# Altium PCB PCB1.PcbDoc
Units mm, origin at the board's own origin, x right, y up, seen from the top; angles counter-clockwise.
Board outline 47 x 47 mm, 2 copper layers (Top Layer, Bottom Layer); 38 components, 26 nets, 134 pads, 140 vias.
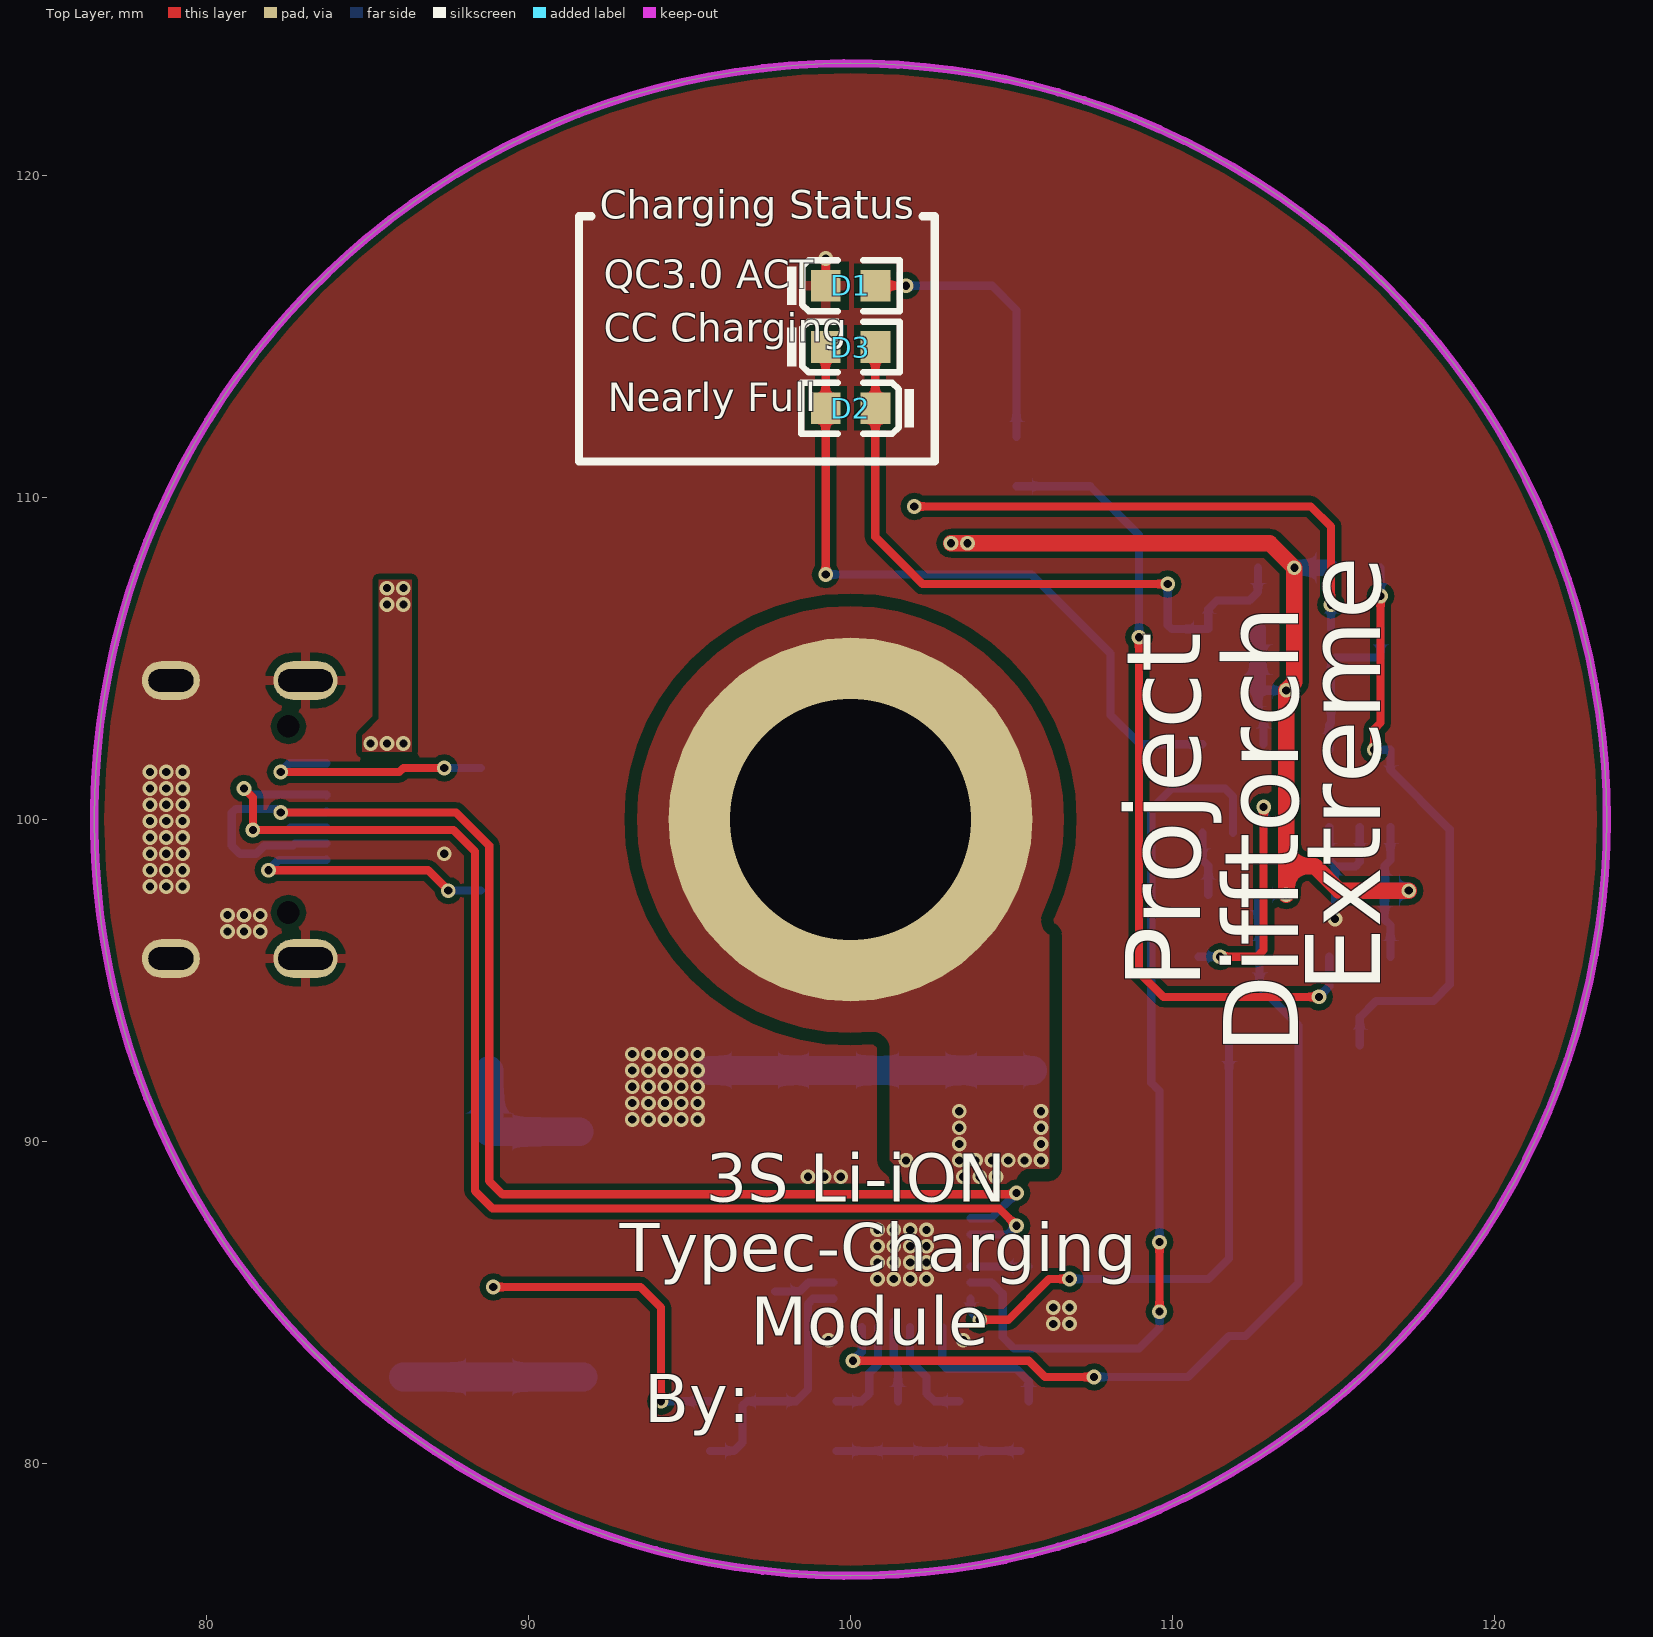
[diagram p0: Top Layer view]
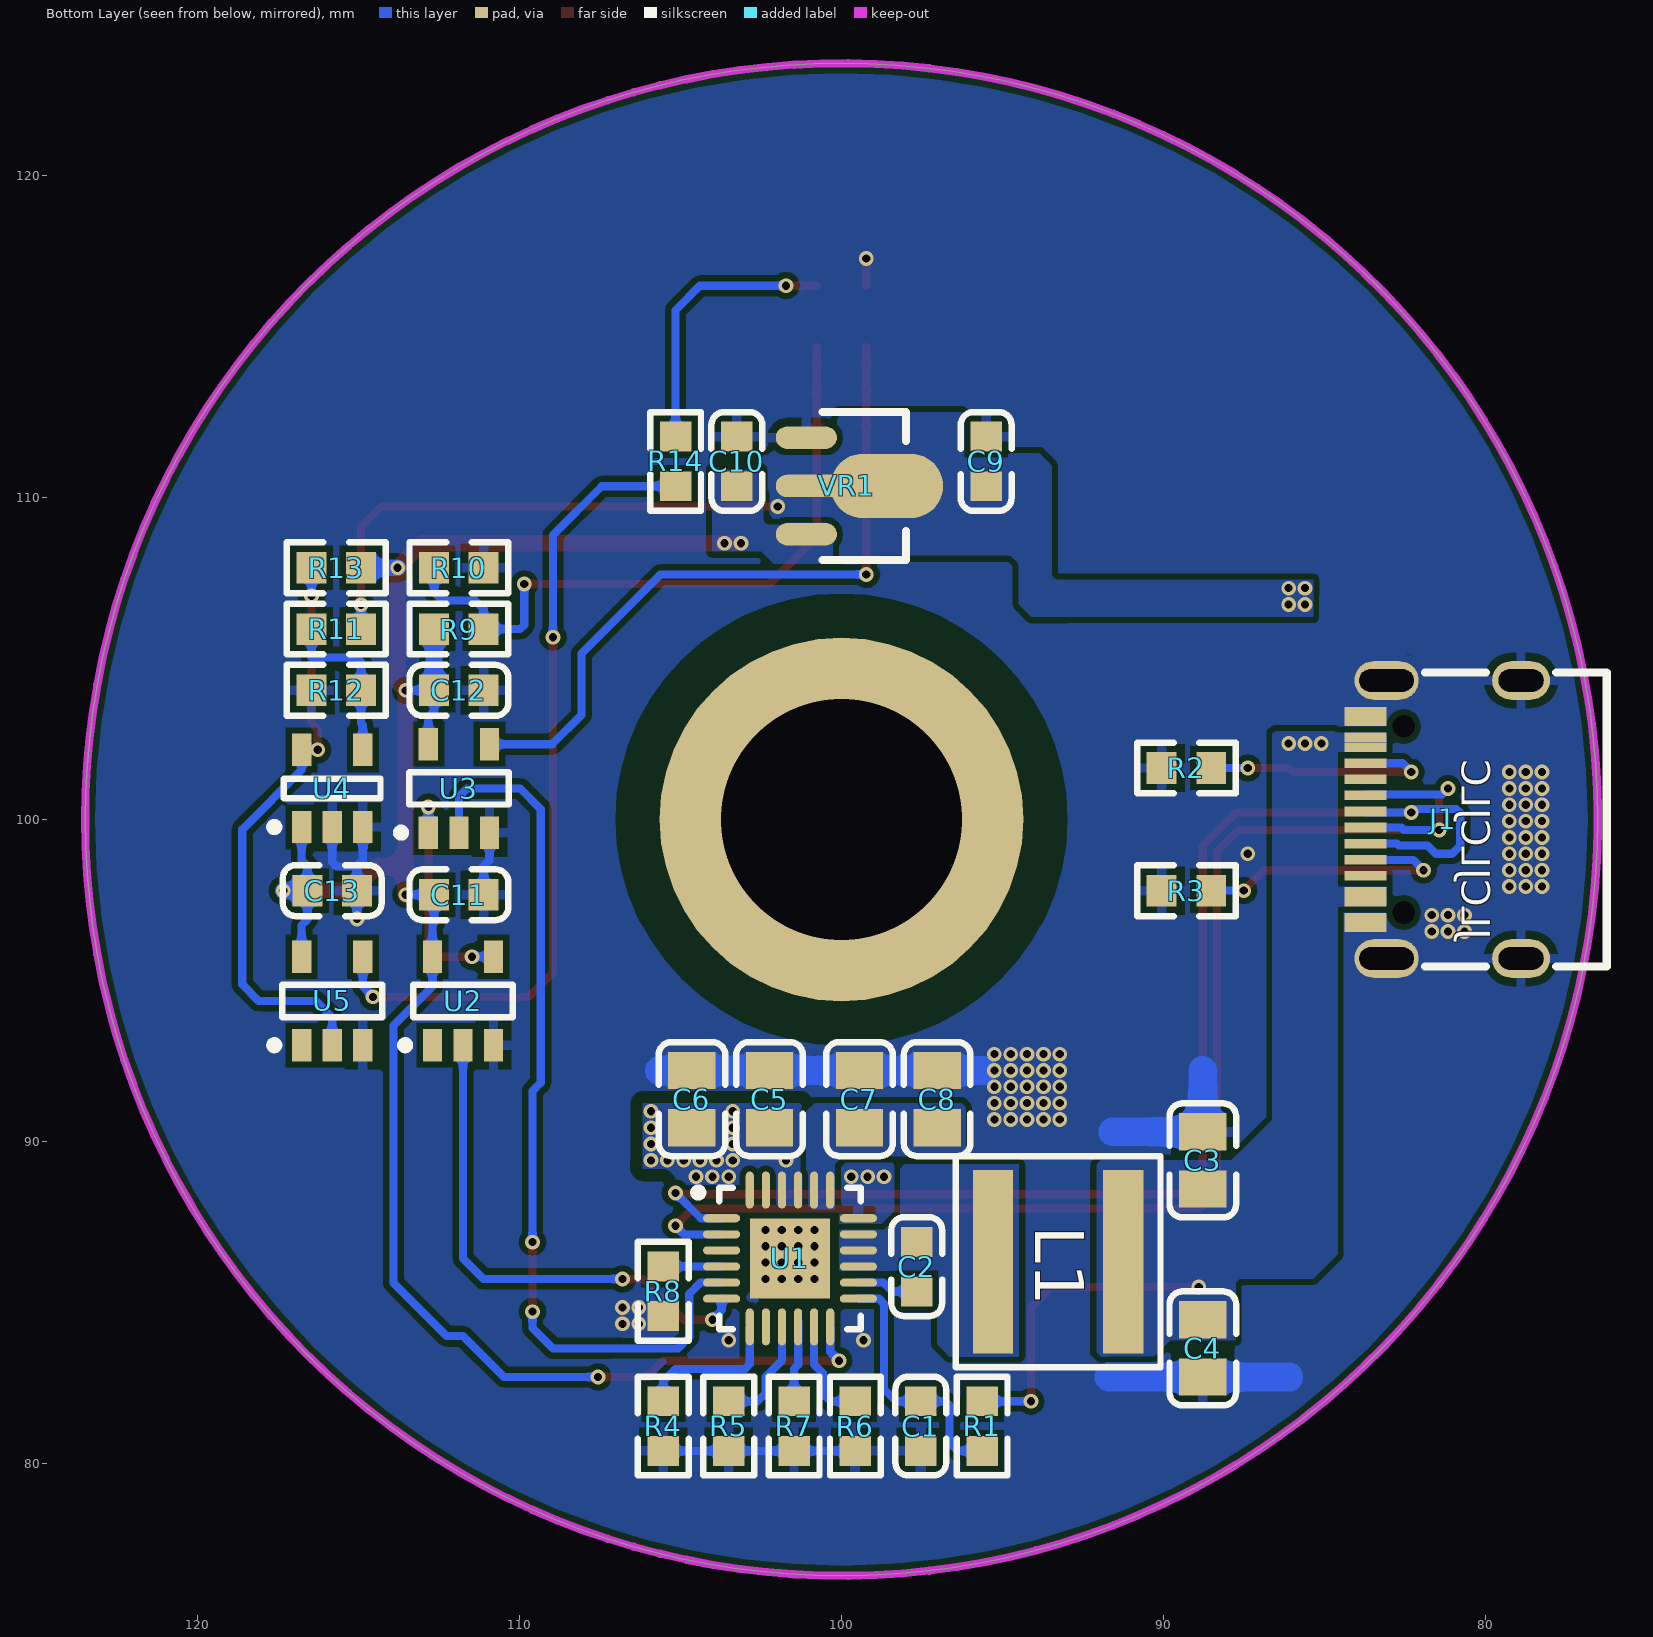
[diagram p1: Bottom Layer view, seen from below]
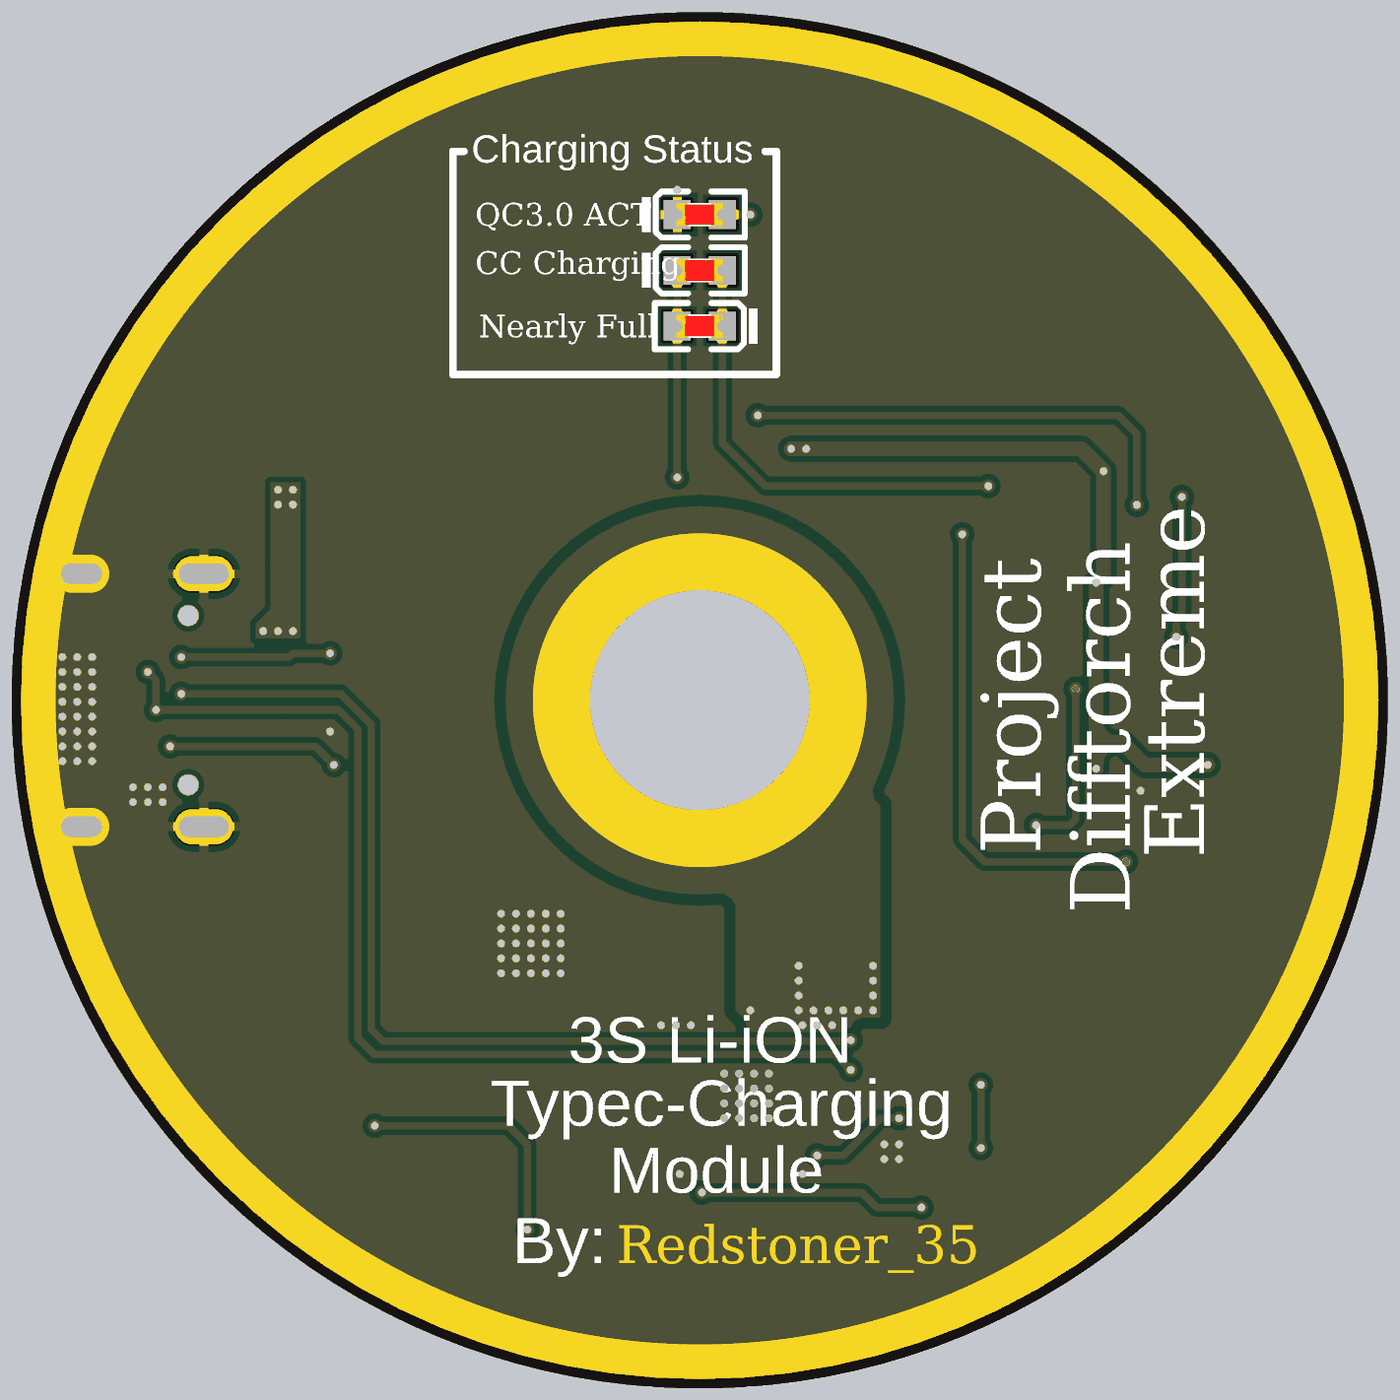
[diagram p2: 3D render of the assembled board from above, using the file's embedded part models]
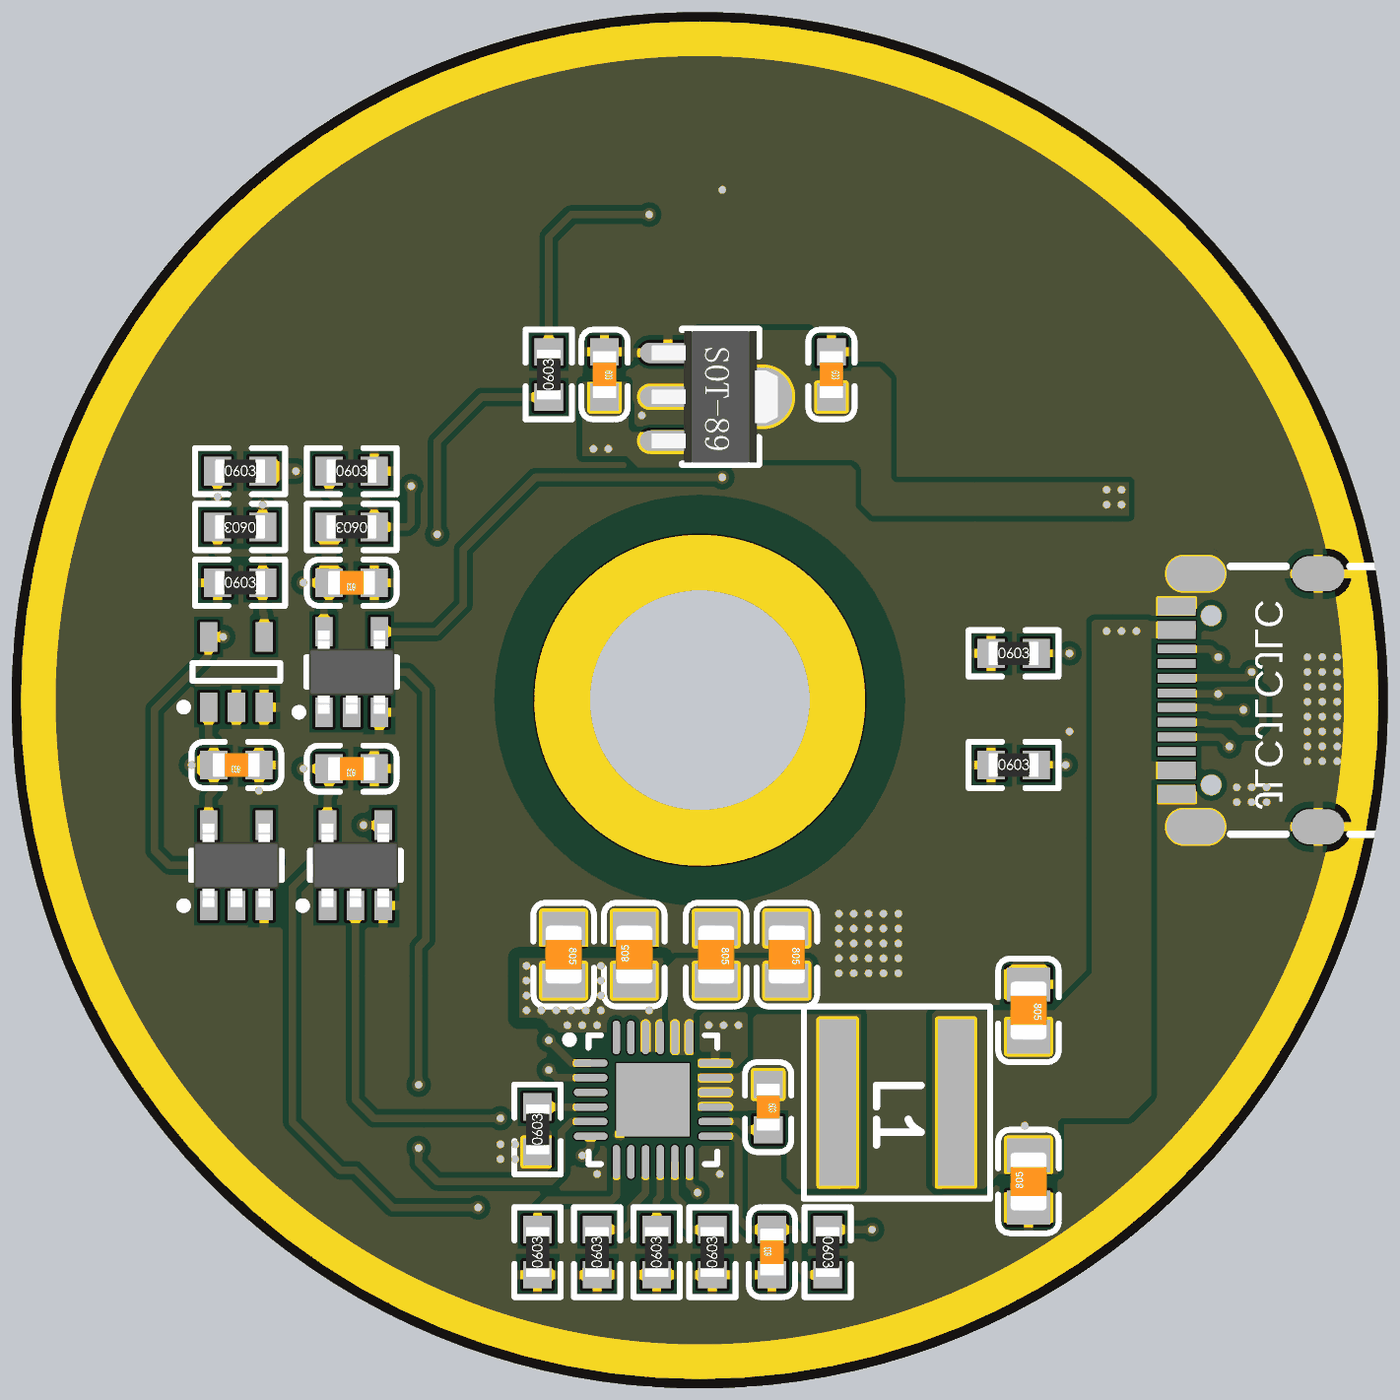
[diagram p3: 3D render of the assembled board from below, using the file's embedded part models]

## Layer stack, top to bottom
Top Solder: solder mask 0.0102, Solder Resist, Dk 3.5
Top Layer: signal copper 0.0356
Dielectric 1: dielectric 0.32, FR-4, Dk 4.8
Bottom Layer: signal copper 0.0356
Bottom Solder: solder mask 0.0102, Solder Resist, Dk 3.5

## Board outline
100,76.5 cw(c100,100) 76.5,100 cw(c100,100) 100,123.5 cw(c100,100) 123.5,100 cw(c100,100)

## Design rules (kind name [scope] priority, off if disabled: settings)
Clearance [All] p1: gap=0.191
PolygonConnect PolygonConnect_1 [IsVia] p1: connectstyle=Direct reliefconductorwidth=0.254 reliefentries=4 polygonreliefangle="90 Angle" airgapwidth=0.254
PolygonConnect [All] p2: connectstyle=Direct reliefconductorwidth=0.305 reliefentries=4 polygonreliefangle="90 Angle" airgapwidth=0.254
RoomDefinition main [InComponentClass('main')] p1: confinementstyle=ConfineIn formatcopy=TRUE lockcomponents=FALSE outline 124.587,77.978 135.001,77.978 135.001,89.281 124.587,89.281
RoutingVias [All] p1: holewidth=0.711 width=1.27 viastyle="Through Hole" minholewidth=0.711 minwidth=1.27 maxholewidth=0.711 maxwidth=1.27
SolderMaskExpansion [All] p1: expansion=0.102
Width [All] p1: maxlimit=5.08 minlimit=0.203 preferedwidth=0.254
30 further rules are at their usual default settings.

## Components (designator, comment, footprint, x,y, rotation, side; value= is the part's Value field where it differs from the comment)
C1 "10uF (106) 10% 10V" 0603_C 97.536,81.153 r90 bottom
C2 "100nF (104) 10% 50V" 0603_C 97.663,86.106 r270 bottom
C3 "10uF (106) 10% 25V" 0805_C 88.773,89.408 r270 bottom
C4 "10uF (106) 10% 25V" 0805_C 88.773,83.566 r90 bottom
C5 "22uF (226) 20% 25V" 0805_C 102.235,91.313 r90 bottom
C6 "22uF (226) 20% 25V" 0805_C 104.648,91.313 r270 bottom
C7 "22uF (226) 20% 25V" 0805_C 99.441,91.313 r270 bottom
C8 "22uF (226) 20% 25V" 0805_C 97.028,91.313 r270 bottom
C9 "100nF (104) 10% 50V" 0603_C 95.504,111.125 r270 bottom
C10 "10uF (106) 10% 10V" 0603_C 103.251,111.125 r270 bottom
C11 "100nF (104) 10% 50V" 0603_C 111.887,97.663 r0 bottom
C12 "100nF (104) 10% 50V" 0603_C 111.887,104.013 r0 bottom
C13 "100nF (104) 10% 50V" 0603_C 115.824,97.79 r0 bottom
D1 "白灯 0603" 0603_LED_S1 100,116.586 r0 top locked
D2 "黄灯 0603" 0603_LED_S1 100,112.776 r180 top locked
D3 "绿灯 0603" 0603_LED_S1 100,114.681 r0 top locked
J1 "TYPEC 16P" USB-C-SMD_KH-TYPE-C-16P 81.3,100 r90 bottom locked
L1 "XAL6030-222MEC" XAL6030-xxxME 95.25,86.233 r180 bottom
R1 "1Ω (1R00) ±1%" 0603_R 95.631,81.153 r270 bottom
R2 "5.1KΩ (5101) ±1%" 0603_R 89.281,101.6 r180 bottom
R3 "5.1KΩ (5101) ±1%" 0603_R 89.281,97.79 r180 bottom
R4 "120KΩ (1203) ±1%" 0603_R 105.537,81.153 r90 bottom
R5 "68KΩ (6802) ±1%" 0603_R 103.505,81.153 r90 bottom
R6 "62KΩ (6202) ±1%" 0603_R 99.568,81.153 r90 bottom
R7 "1KΩ (1001) ±1%" 0603_R 101.473,81.153 r90 bottom
R8 "100KΩ (1003) ±1% B4100-NTC" 0603_R 105.537,85.344 r90 bottom
R9 "2KΩ (2001) ±1%" 0603_R 111.887,105.918 r0 bottom
R10 "2KΩ (2001) ±1%" 0603_R 111.887,107.823 r180 bottom
R11 "15KΩ (1502) ±1%" 0603_R 115.697,105.918 r0 bottom
R12 "510Ω (5100) ±1%" 0603_R 115.697,104.013 r180 bottom
R13 "62KΩ (6202) ±1%" 0603_R 115.697,107.823 r180 bottom
R14 "2KΩ (2001) ±1%" 0603_R 105.156,111.125 r90 bottom
U1 "IP2326" QFN50P400X400X80_HS-25M 101.6,86.36 r180 bottom
U2 "SN74LVC1G14DBVR" DBV0005A_N 111.76,94.361 r90 bottom
U3 "SN74LVC1G125DBVR" DBV0005A_N 111.887,100.965 r90 bottom
U4 "MAX9062EUK+" SOT95P245X110-5N 115.824,100.965 r90 bottom
U5 "SN74LVC1G17DBVR" DBV0005A_N 115.824,94.361 r90 bottom
VR1 "HT7550-1" SOT-89(SOT-89-3) 101.092,110.363 r0 bottom

## Footprints (in the part's own frame and the unit in brackets; to place one, negate y for a bottom-side part, rotate by r counter-clockwise, add the part's x,y. Pads: shape width x height; smd on the part's side, far side on the other; paste and mask are expansions set on the pad)
0603_C [mm]
  rect 0.93x0.98 smd: 1(-0.77,0) 2(0.77,0)
  silkscreen extent -1.53,-0.79 1.54,0.79, body extent -0.8,-0.4 0.8,0.4, height 0.3
0603_LED_S1 [mm]
  rect 0.93x0.98 smd: A(0.77,0) K(-0.77,0)
  silkscreen extent -1.97,-0.79 1.54,0.79, body extent -0.8,-0.4 0.8,0.4, height 0.6
0603_R [mm]
  rect 0.93x0.98 smd: 1(-0.77,0) 2(0.77,0)
  silkscreen extent -1.53,-0.79 1.54,0.79, body extent -0.85,-0.4 0.85,0.4, height 0.56
0805_C [mm]
  rect 1.16x1.47 smd: 1(-0.89,0) 2(0.89,0)
  silkscreen extent -1.77,-1.04 1.77,1.04, body extent -1,-0.63 1,0.63, height 0.77
DBV0005A_N [mm] "SOT23, 5-Leads, Body 3.05x1.75mm, Pitch 0.95mm, IPC Medium Density"
  rect 1x0.6 smd: 1(-1.375,0.95) 2(-1.375,0) 3(-1.375,-0.95) 4(1.375,-0.95) 5(1.375,0.95)
  silkscreen extent -1.5,-1.55 0.5,1.93, body extent -1.42,-1.46 1.42,1.46, height 1.08
QFN50P400X400X80_HS-25M [mm] "QFN, 24-Leads, Body 4.00x4.00mm, Pitch 0.50mm, Thermal Pad 2.50x2.50mm, IPC Low Density"
  oval 1.15x0.25 smd mask+0.05: 1(-2.125,1.25) 2(-2.125,0.75) 3(-2.125,0.25) 4(-2.125,-0.25) 5(-2.125,-0.75) 6(-2.125,-1.25) 13(2.125,-1.25) 14(2.125,-0.75) 15(2.125,-0.25) 16(2.125,0.25) 17(2.125,0.75) 18(2.125,1.25)
  oval 0.25x1.15 smd mask+0.05: 7(-1.25,-2.125) 8(-0.75,-2.125) 9(-0.25,-2.125) 10(0.25,-2.125) 11(0.75,-2.125) 12(1.25,-2.125) 19(1.25,2.125) 20(0.75,2.125) 21(0.25,2.125) 22(-0.25,2.125) 23(-0.75,2.125) 24(-1.25,2.125)
  rect 2.5x2.5 smd mask+0.05: 25(0,0)
  silkscreen extent -2.98,-2.2 2.2,2.2, body extent -2.05,-2.05 2.05,2.05, height 0.8
SOT95P245X110-5N [mm] "SOT23, 5-Leads, Body 2.90x2.45mm, Pitch 0.95mm, IPC Medium Density"
  rect 1x0.6 smd: 1(-1.2,0.95) 2(-1.2,0) 3(-1.2,-0.95) 4(1.2,-0.95) 5(1.2,0.95)
  silkscreen extent -1.32,-1.5 0.3,1.93, body extent -0.7,-1.5 0.7,1.5, height 1.1
SOT-89(SOT-89-3) [mm]
  oval 1.9x0.7 smd: 1(0,-1.5) 3(0,1.5)
  oval 3.5x2 smd: 2(-2.5,0)
  oval 2.1x0.7 smd: 2(-0.1,0)
  silkscreen extent -3.1,-2.3 -0.5,2.3, body extent -3.75,-2.25 0.55,2.25, height 1.51
USB-C-SMD_KH-TYPE-C-16P [mm]
  rect 0.1x0.1 hole 0.7 mask+0.05: 0(-2.89,1.235) 0(2.89,1.235)
  oval 1.2x1.8 hole 0.7 slot 1.4 at 90 deg mask+0.051: 1(-4.32,-2.415) 1(4.32,-2.415)
  oval 1.2x2 hole 0.7 slot 1.7 at 90 deg mask+0.051: 1(-4.32,1.765) 1(4.32,1.765)
  rect 0.3x1.3 smd paste-100 mask+0.05: A1(-3.35,2.415) A4(-2.55,2.415) A5(-1.25,2.415) A6(-0.25,2.415) A7(0.25,2.415) A8(1.25,2.415) A9(2.55,2.415) A12(3.35,2.415) B1(3.05,2.415) B4(2.25,2.415) B5(1.75,2.415) B6(0.75,2.415) B7(-0.75,2.415) B8(-1.75,2.415) B9(-2.25,2.415) B12(-3.05,2.415)
  silkscreen extent -4.57,-5.08 4.57,0.57
XAL6030-xxxME [mm] "CoilCraft XAL6030 molded inductor"
  rect 1.25x5.69 smd: 1(4.001,0.025) 2(-0.039,0.025)
  silkscreen extent -1.2,-3.25 5.16,3.31, body extent -1.19,-3.28 5.16,3.33, height 3.1

## Part data
C1 C10: library part "0603 10uF (106) 10% 10V", "贴片电容"
C2 C9 C11 C12 C13: library part "0603 100nF (104) 10% 50V", "贴片电容"
C3 C4: library part "0805 10uF (106) 10% 25V", "贴片电容"
C5 C6 C7 C8: library part "0805 22uF (226) 20% 25V", "贴片电容"
D1: library part "0603 白灯", "发光二极管"
D2: library part "0603 黄灯", "发光二极管"
D3: library part "0603 绿灯", "发光二极管"
J1: library part KH-TYPEC-16P, "16Pin TypeC立贴座子"
L1: library part "Inductor Iron", "Magnetic-Core Inductor"
R1: library part "0603 1Ω (1R00) 1%", "贴片电阻"
R2 R3: library part "0603 5.1KΩ (5101) 1%", "贴片电阻"
R4: library part "0603 120KΩ (1203) 1%", "贴片电阻"
R5: library part "0603 68KΩ (6802) 1%", "贴片电阻"
R6 R13: library part "0603 62KΩ (6202) 1%", "贴片电阻"
R7: library part "0603 1KΩ (1001) 1%", "贴片电阻"
R8: library part "0603 100KΩ (1003) 1%", "贴片NTC热敏电阻"
R9 R10 R14: library part "0603 2KΩ (2001) 1%", "贴片电阻"
R11: library part "0603 15KΩ (1502) 1%", "贴片电阻"
R12: library part "0603 510Ω (5100) 1%", "贴片电阻"
U1: "1.5A 2/3S Li-ION Battery charger"
U2: "Single Schmitt-Trigger Inverter, DBV0005A, LARGE T&R"
U3: "Single Bus Buffer Gate With 3-State Outputs, DBV0005A, LARGE T&R"
U4: library part MAX9062, "tiny Comparator with 0.2V Ref OD Output"
U5: "Single Schmitt-Trigger Buffer, DBV0005A, LARGE T&R"
VR1: library part "SOT-89 HT7550-1", "低压差线性稳压(LDO)"

## Free pads (board coordinates)
  round 11.3 hole 7.5 mask+0.05: 1(100,100)

## Via types
v1: diameter 0.457, hole 0.254, Top Layer to Bottom Layer, tented both sides, 140 vias

## Nets (pads, with @x,y where several pads share a name; then routed paths per layer and width w, separated by ;. In a path a pad name is that pad's centre, name@x,y a point inside that pad or via, vN(x,y) a via of type N, cw(c..) or ccw(c..) an arc to the next point about the centre after c; other vN are vias at no path point)
5V: C3.2 C4.2 C9.2 J1.A4 J1.A9 J1.B4 J1.B9 L1.1 R1.1 R11.1 VR1.2 | length 26.3
  Top Layer w0.254: v1(88.9,85.471) 93.472,85.471 94.107,84.836 v1@94.107,81.923 ; v1(101.981,109.728) 114.3,109.728 114.927,109.101 v1(114.927,106.672)
  Bottom Layer w0.254: v1(94.115,81.923) R1.1 ; R11.1 v1(114.927,106.672)
  other v1: 85.09,102.362 85.598,102.362 86.106,102.362 85.598,106.68 86.106,106.68 85.598,107.188 86.106,107.188
BATTSTAT: U1.5 U3.2 | length 28
  Top Layer w0.254: v1(109.601,84.709) v1(109.601,86.868)
  Bottom Layer w0.254: U1.5 104.382,85.61 104.729,85.263 104.729,83.919 105.082,83.566 108.966,83.566 109.601,84.201 v1(109.601,84.709) ; v1(109.601,86.868) 109.601,91.567 109.347,91.821 109.347,100.33 109.982,100.965 111.633,100.965 111.887,100.711 U3.2
BOOT: C2.2 U1.14 | length 1.9
  Bottom Layer w0.254: C2.2 98.417,85.336 98.691,85.61 U1.14
CC: U1.6 U2.2 | length 15.9
  Top Layer w0.254: v1(104.013,84.455) 104.902,84.455 106.172,85.725 v1(106.807,85.725)
  Bottom Layer w0.254: U1.6 103.725,84.743 v1(104.013,84.455) ; v1(106.807,85.725) 111.125,85.725 111.76,86.36 U2.2
CC1: J1.A5 R3.2 | length 8.8
  Top Layer w0.254: v1(81.915,98.425) 86.868,98.425 v1(87.503,97.79)
  Bottom Layer w0.254: v1(81.915,98.425) 82.233,98.742 83.715,98.742 J1.A5 ; v1(87.503,97.79) R3.2
CC2: J1.B5 R2.2 | length 7.8
  Top Layer w0.254: v1(82.296,101.473) 85.979,101.473 86.106,101.6 v1(87.376,101.6)
  Bottom Layer w0.254: v1(82.296,101.473) 82.573,101.75 J1.B5 ; v1(87.376,101.6) R2.2
CHGLED: D2.K D3.A R9.1 R10.1 | length 21.3
  Top Layer w0.254: D3.A D2.K 100.77,108.78 102.235,107.315 v1(109.855,107.315)
  Bottom Layer w0.254: v1(109.855,107.315) 109.855,106.045 109.982,105.918 R9.1 111.117,106.545 111.379,106.807 112.395,106.807 112.657,107.069 R10.1
CHGLED+: D2.A D3.K U3.4 | length 22.1
  Top Layer w0.254: v1(99.23,107.612) D3.K
  Bottom Layer w0.254: v1(99.23,107.612) 105.621,107.612 108.077,105.156 108.077,103.251 108.988,102.34 U3.4
COMP: R13.1 U4.5 U5.2 | length 18.4
  Top Layer w0.254: v1(116.275,102.165) 116.275,102.813 116.467,103.005 v1(116.467,106.942)
  Bottom Layer w0.254: U5.2 115.824,93.853 116.332,94.361 118.11,94.361 118.618,94.869 118.618,99.695 116.774,101.539 U4.5 v1(116.275,102.165) ; v1(116.467,106.942) R13.1
GND: C1.1 C3.1 C4.1 C5.2 C6.1 C7.1 C8.1 C9.1 C10.1 C11.1 C12.1 C13.1 D1.K J1.1 J1.A1 J1.A12 J1.B1 J1.B12 R2.1 R3.1 R4.1 R5.1 R6.1 R7.1 R8.1 R10.2 R12.1 U1.18 U1.25 U2.3 U3.3 U4.2 U4.3 U5.3 VR1.1 | length 33.7
  Top Layer w0.254: D1.K v1(99.23,117.432)
  Bottom Layer w0.254: R6.1 R7.1 R4.1@105.283,80.383 ; U3.3 110.937,98.74 111.117,98.56 C11.1 ; U4.3 114.874,98.74 115.062,98.552 ; v1(115.054,96.909) C13.1 115.054,98.544 115.689,98.544 115.824,98.679 U4.2
  Bottom Layer w0.889: 86.107,82.676 C4.1 91.695,82.676 ; 88.773,92.202 C3.1 91.566,90.298 ; 95.631,92.202 105.664,92.202
  other v1: 99.314,83.82 103.505,83.82 106.299,84.328 106.807,84.328 106.299,84.836 106.807,84.836 100.838,85.725 101.346,85.725 101.854,85.725 102.362,85.725 100.838,86.233 101.346,86.233 101.854,86.233 102.362,86.233 100.838,86.741 101.346,86.741 101.854,86.741 102.362,86.741 100.838,87.249 101.346,87.249 101.854,87.249 102.362,87.249 98.679,88.9 99.187,88.9 99.695,88.9 93.218,90.678 93.726,90.678 94.234,90.678 94.742,90.678 95.25,90.678 93.218,91.186 93.726,91.186 94.234,91.186 94.742,91.186 95.25,91.186 93.218,91.694 93.726,91.694 94.234,91.694 94.742,91.694 95.25,91.694 93.218,92.202 93.726,92.202 94.234,92.202 94.742,92.202 95.25,92.202 93.218,92.71 93.726,92.71 94.234,92.71 94.742,92.71 95.25,92.71 80.645,96.52 81.153,96.52 81.661,96.52 80.645,97.028 81.153,97.028 81.661,97.028 78.232,97.917 78.74,97.917 79.248,97.917 78.232,98.425 78.74,98.425 79.248,98.425 78.232,98.933 78.74,98.933 79.248,98.933 87.376,98.933 78.232,99.441 78.74,99.441 79.248,99.441 78.232,99.949 78.74,99.949 79.248,99.949 78.232,100.457 78.74,100.457 79.248,100.457 78.232,100.965 78.74,100.965 79.248,100.965 78.232,101.473 78.74,101.473 79.248,101.473
LX: C2.1 L1.2 U1.15 U1.16 U1.17
NetC1_2: C1.2 R1.2 U1.13 | length 8
  Bottom Layer w0.254: R1.2 96.385,80.383 96.647,80.645 96.647,81.788 96.782,81.923 C1.2 98.306,81.923 98.679,82.296 98.679,84.951 98.838,85.11 U1.13
NetD1_A: D1.A R14.2 | length 8.6
  Top Layer w0.254: D1.A v1(101.727,116.586)
  Bottom Layer w0.254: v1(101.727,116.586) 104.394,116.586 105.156,115.824 R14.2
NetR4_2: R4.2 U1.7 | length 4.7
  Bottom Layer w0.254: U1.7 102.85,83.078 102.997,82.931 105.156,82.931 105.537,82.55 R4.2
NetR5_2: R5.2 U1.9 | length 3.4
  Bottom Layer w0.254: U1.9 101.85,83.189 102.362,82.677 102.362,82.169 102.608,81.923 R5.2@103.378,81.923
NetR6_2: R6.2 U1.11 | length 3.3
  Bottom Layer w0.254: R6.2 100.338,81.923 100.584,82.169 100.584,82.804 100.85,83.07 U1.11
NetR7_2: R7.2 U1.10 | length 2.5
  Bottom Layer w0.254: U1.10@101.346,84.401 101.346,83.058 101.473,82.931 R7.2
NetR8_2: R8.2 U1.4 | length 1.8
  Bottom Layer w0.254: U1.4 R8.2@105.533,86.11
NetR11_2: R11.2 R12.2 U4.4 | length 5.2
  Bottom Layer w0.254: U4.4 114.874,102.936 114.927,102.989 R12.2 114.927,104.894 115.07,105.037 116.467,105.037 R11.2
NetR14_1: R14.1 U5.4 | length 25.3
  Top Layer w0.254: v1(108.966,105.664) 108.966,95.25 109.728,94.488 v1(114.554,94.488)
  Bottom Layer w0.254: R14.1 107.45,110.355 108.966,108.839 v1(108.966,105.664) ; v1(114.554,94.488) 114.874,94.808 U5.4
NetU2_4: U2.4 U3.1 | length 7.4
  Top Layer w0.254: v1(111.484,95.736) 112.627,95.736 112.837,95.946 v1(112.837,100.391)
  Bottom Layer w0.254: U2.4 v1(111.484,95.736) ; U3.1 v1(112.837,100.391)
USBDN: J1.A7 J1.B7 U1.1 | length 42.9
  Top Layer w0.254: v1(82.296,100.218) 87.742,100.218 88.773,99.187 88.773,88.773 89.192,88.354 105.118,88.354 v1(105.156,88.392)
  Bottom Layer w0.254: J1.B7 82.74,99.25 82.677,99.187 81.788,99.187 81.534,98.933 81.026,98.933 80.772,99.187 80.772,100.203 80.899,100.33 82.184,100.33 v1(82.296,100.218) 83.683,100.218 J1.A7 ; U1.1 104.374,87.61 v1(105.156,88.392)
USBDP: J1.A6 J1.B6 U1.2 | length 42.9
  Top Layer w0.254: v1(81.153,100.965) 81.431,100.687 v1(81.431,99.671) 87.66,99.671 88.328,99.003 88.328,88.462 88.881,87.909 104.623,87.909 v1(105.156,87.376)
  Bottom Layer w0.254: v1(81.153,100.965) 81.343,100.774 83.715,100.774 J1.B6 ; v1(81.431,99.671) 82.522,99.671 82.601,99.75 J1.A6 ; U1.2 104.89,87.11 v1(105.156,87.376)
VAUX: C10.2 C11.2 C12.2 C13.2 R9.2 R13.2 U1.12 U2.5 U3.5 U4.1 U5.5 VR1.3 | length 65.9
  Top Layer w0.254: v1(100.076,83.185) 105.537,83.185 106.045,82.677 v1(107.569,82.677)
  Top Layer w0.508: v1(103.124,108.585) 113.03,108.585 v1(113.792,107.823) 113.792,104.267 v1(113.538,104.013) 113.538,98.552 ; v1(113.538,97.663) 113.538,98.552 ; v1(117.348,97.79) 115.189,97.79 114.427,98.552 113.538,98.552
  Bottom Layer w0.254: v1(100.076,83.185) 100.35,83.459 U1.12 ; v1(107.569,82.677) 110.49,82.677 111.76,83.947 112.268,83.947 113.919,85.598 113.919,93.599 112.71,94.808 U2.5 112.71,96.713 112.657,96.766 C11.2 v1(113.538,97.663) ; U3.5 112.837,103.19 112.657,103.37 C12.2 v1(113.538,104.013) ; U5.5 116.774,96.713 116.594,96.893 C13.2 116.594,98.56 116.774,98.74 U4.1
  Bottom Layer w0.508: C12.2 R9.2 ; v1(113.792,107.823) R13.2 ; C13.2 v1(117.348,97.79)
  other v1: 103.632,108.585
VBATT: C5.1 C6.2 pad.1 U1.21 U1.22
  other v1: 103.505,88.9 104.013,88.9 104.521,88.9 101.727,89.408 103.378,89.408 103.886,89.408 104.394,89.408 104.902,89.408 105.41,89.408 105.918,89.408 103.378,89.916 105.918,89.916 103.378,90.424 105.918,90.424 103.378,90.932 105.918,90.932
VSYS: C7.2 C8.2 U1.19 U1.20
pads on no net: J1.0 J1.A8 J1.B8 U1.3 U1.8 U1.23 U1.24 U2.1 U5.1

## Polygon pours and split planes (outlines as drawn)
VBATT on Top Layer "Component Side-No Net 1" (solid, remove dead copper, pour order 34): 105.664,91.186 106.172,91.186 106.172,89.154 105.664,89.154 103.124,89.154 101.473,89.154 101.346,89.281 101.219,89.408 101.219,92.075 101.219,93.345 100.965,93.599 96.012,93.599 94.869,93.599 94.488,93.98 93.98,94.488 93.98,100.584 93.98,105.283 94.488,105.791 94.615,105.918 104.648,105.918 105.537,105.918 106.172,105.283 106.172,92.583 106.172,91.186
5V on Top Layer "Component Side-No Net 1" (solid, remove dead copper, pour order 49): 84.836,102.108 84.836,102.616 84.963,102.743 85.344,103.124 85.344,106.426 85.344,107.442 86.36,107.442 86.36,102.108
GND on Top Layer "Component Side-No Net 1" (solid, remove dead copper, pour order 50): 73.152,125.857 124.587,125.857 129.032,121.412 129.032,77.089 119.888,77.089 114.681,71.882 113.538,73.025 71.755,73.025
VBATT on Top Layer "Component Side-No Net 1" (solid, remove dead copper, pour order 52): 92.329,107.061 92.583,107.315 108.077,107.315 108.077,88.773 108.458,88.392 108.42,88.354 91.059,88.354 91.059,97.155
GND on Top Layer "Component Side-No Net 1" (solid, remove dead copper, pour order 53): 76.962,106.553 77.216,106.299 80.264,106.299 80.264,94.234 80.01,93.98 79.883,94.107 77.089,94.107
5V on Bottom Layer "Component Side-No Net 1" (solid, remove dead copper, pour order 28): 87.757,83.82 89.789,83.82 90.297,83.312 91.948,83.312 92.075,83.439 92.075,86.36 92.075,89.281 91.948,89.408 88.011,89.408 87.884,89.408 87.63,89.662 86.614,90.678 86.614,97.536 86.614,102.87 86.487,102.743 84.582,102.743 84.582,86.487 84.963,86.106 85.344,85.725 86.614,85.725 87.63,85.725 87.757,85.598
GND on Bottom Layer "Component Side-No Net 1" (solid, remove dead copper, pour order 29): 74.803,106.553 75.311,106.045 90.932,106.045 90.932,90.424 91.948,89.408 92.075,89.281 92.075,83.439 92.075,81.788 92.456,81.407 92.837,81.026 98.298,81.026 98.298,76.581 98.171,76.454 97.536,77.089 75.184,77.089 71.374,77.089 70.993,77.47
LX on Bottom Layer "Component Side-No Net 1" (solid, remove dead copper, pour order 30): 94.488,89.281 94.488,83.312 96.647,83.312 96.774,83.439 97.028,83.693 97.028,85.725 97.028,85.852 97.155,85.979 100.076,85.979 100.076,87.249 99.822,87.249 98.679,87.249 98.425,87.503 98.171,87.757 98.171,89.027 98.171,89.154 98.044,89.281
GND on Bottom Layer "Component Side-No Net 1" (solid, remove dead copper, pour order 31): 99.06,87.757 100.076,87.757 100.076,87.249 98.552,87.249 98.171,87.63 98.171,89.154 99.949,89.154 99.949,88.138 98.933,88.138 98.933,87.757
VSYS on Bottom Layer "Component Side-No Net 1" (solid, remove dead copper, pour order 32): 100.203,87.884 101.092,87.884 101.092,89.789 101.092,90.932 100.965,91.059 100.838,91.186 99.187,91.186 96.266,91.186 96.139,91.059 96.139,89.916 96.139,89.789 96.266,89.662 96.393,89.535 98.806,89.535 99.949,89.535 100.203,89.281
VBATT on Bottom Layer "Component Side-No Net 1" (solid, remove dead copper, pour order 33): 101.033,88.011 101.092,88.011 101.219,87.884 102.108,87.884 102.108,89.154 102.235,89.154 105.664,89.154 105.664,89.281 105.664,91.186 101.092,91.186 100.965,91.059
GND on Bottom Layer "Component Side-No Net 1" (solid, remove dead copper, pour order 36): 104.902,85.09 107.188,85.09 107.188,84.074 104.902,84.074
GND on Bottom Layer "Component Side-No Net 1" (solid, remove dead copper, pour order 37): 98.425,81.28 105.791,81.28 106.045,81.534 105.791,81.788 105.664,82.55 105.409,82.55 105.283,82.804 105.303,83.078 102.85,83.078 102.85,84.689 103.124,84.963 103.251,85.09 104.648,85.09 104.648,83.947 107.188,83.947 107.188,77.597 107.442,77.343 107.061,76.962 107.061,75.057 90.805,76.708 89.662,77.851 89.662,79.756 89.662,81.788 90.043,82.169
GND on Bottom Layer "Component Side-No Net 1" (solid, remove dead copper, pour order 38): 87.249,83.693 87.63,83.312 96.647,83.312 96.647,84.582 97.028,84.963 97.155,85.09 99.949,85.09 99.949,84.963 100.203,84.709 100.33,84.582 100.33,78.359 92.859,78.359 92.548,78.048 92.491,78.105 86.233,78.105
VAUX on Bottom Layer "Component Side-No Net 1" (solid, remove dead copper, pour order 39): 100.203,109.347 102.235,109.347 102.235,109.982 102.362,110.109 104.013,110.109 104.013,108.331 102.489,108.331 102.235,108.077 102.108,107.95 100.076,107.95
VAUX on Bottom Layer "Component Side-No Net 1" (solid, remove dead copper, pour order 40): 102.489,109.982 102.489,110.871 104.013,110.871 104.013,109.347
VBATT on Bottom Layer "Component Side-No Net 1" (solid, remove dead copper, pour order 41): 104.775,91.186 106.172,91.186 106.172,89.154 103.886,89.154 103.051,89.154 102.973,89.232 102.743,89.462 102.743,91.186
GND on Bottom Layer "Component Side-No Net 1" (solid, remove dead copper, pour order 42): 106.172,93.345 94.488,93.345 93.599,94.234 92.964,94.869 92.964,103.886 92.964,106.426 92.456,106.934 84.709,106.934 84.709,103.759 90.932,103.459 90.932,101.219 90.932,90.258 91.588,89.602 91.958,89.232 106.172,89.232
GND on Bottom Layer "Component Side-No Net 1" (solid, remove dead copper, pour order 43): 74.041,128.397 76.454,130.81 131.699,130.81 131.699,76.2 132.969,74.93 131.445,73.406 74.168,73.406
GND on Bottom Layer "Component Side-No Net 1" (solid, remove dead copper, pour order 44): 81.788,104.902 81.788,103.632 81.661,102.997 82.931,102.997 83.058,102.87 84.455,102.87 84.836,102.87 84.963,102.997 84.963,105.283 81.788,105.283 81.661,105.156 81.915,105.41 83.185,105.41
GND on Bottom Layer "Component Side-No Net 1" (solid, remove dead copper, pour order 45): 80.391,97.663 80.391,95.25 80.772,94.869 80.899,94.742 85.344,94.742 85.344,97.155 82.804,97.155 82.804,97.917
5V on Bottom Layer "Component Side-No Net 1" (solid, remove dead copper, pour order 46): 83.058,102.108 85.979,102.108 86.106,101.981 86.233,102.108 86.233,102.743 83.058,102.743
5V on Bottom Layer "Component Side-No Net 1" (solid, remove dead copper, pour order 47): 83.058,97.917 86.106,97.917 86.106,97.155 85.979,97.282 83.058,97.282
5V on Bottom Layer "Component Side-No Net 1" (solid, remove dead copper, pour order 48): 102.507,112.432 102.507,107.63 102.489,107.612 100.541,105.664 93.345,105.664 85.471,105.664 85.344,105.791 85.344,107.696 85.344,112.776 86.106,113.538 86.36,113.792 102.616,113.792
GND on Bottom Layer "Component Side-No Net 1" (solid, remove dead copper, pour order 51): 92.456,96.647 107.188,96.647 108.458,95.377 108.458,89.408 93.472,89.408 92.202,90.678
VBATT on Bottom Layer "Component Side-No Net 1" (solid, remove dead copper, pour order 54): 101.301,88.007 101.424,87.884 103.124,88.646 104.775,88.646 106.68,88.646 106.68,91.567 101.352,91.567 101.183,91.736
GND on Bottom Layer "Component Side-No Net 1" (solid, remove dead copper, pour order 35): 102.616,85.344 102.662,85.298 106.807,85.298 106.807,82.042 106.553,81.788 106.426,81.915 102.108,81.915

## Keep-outs
Keep-Out Layer:
  circle w0.254: c100,100 r23.5

## Silkscreen, mask and mechanical layers (free items; w line width, h text height)
Top Overlay:
  lines w0.254: 91.948,118.745 91.567,118.745 91.567,111.125 102.616,111.125 102.616,117.348 ; 102.235,118.745 102.616,118.745 102.616,117.221
  text "Charging Status" at 92.202,118.364 h1.52
  text "QC3.0 ACT" at 92.329,116.205 h1.52
  text "CC Charging" at 92.329,114.554 h1.52
  text "Nearly Full" at 92.456,112.395 h1.52
  text "Project" at 111.633,94.742 h4 r90
  text "Extreme" at 117.221,94.615 h4 r90
  text "Difftorch" at 114.681,92.71 h4 r90
  text "3S Li-iON" at 95.504,87.63 h2.54
  text "Typec-Charging" at 92.837,85.471 h2.54
  text "Module" at 96.901,83.185 h2.54
  text "By:" at 93.599,80.772 h2.54
Bottom Overlay:
  text "JLCJLCJLC" at 81.026,96.266 h1.52 r90
Top Solder:
  circle w2: c100,100 r23
  text "Redstoner_35" at 97.155,80.772 h2.54
Bottom Solder:
  circle w2: c100,100 r23